# Altium PCB ChipEMG_Ameliore.PcbDoc
Units mil, origin at the board's own origin, x right, y up, seen from the top; angles counter-clockwise.
Board outline 475 x 1625 mil, 6 copper layers (Top Layer, Mid-Layer 1, Mid-Layer 2, VDD, VSS, Bottom Layer); 77 components, 77 nets, 364 pads, 142 vias.
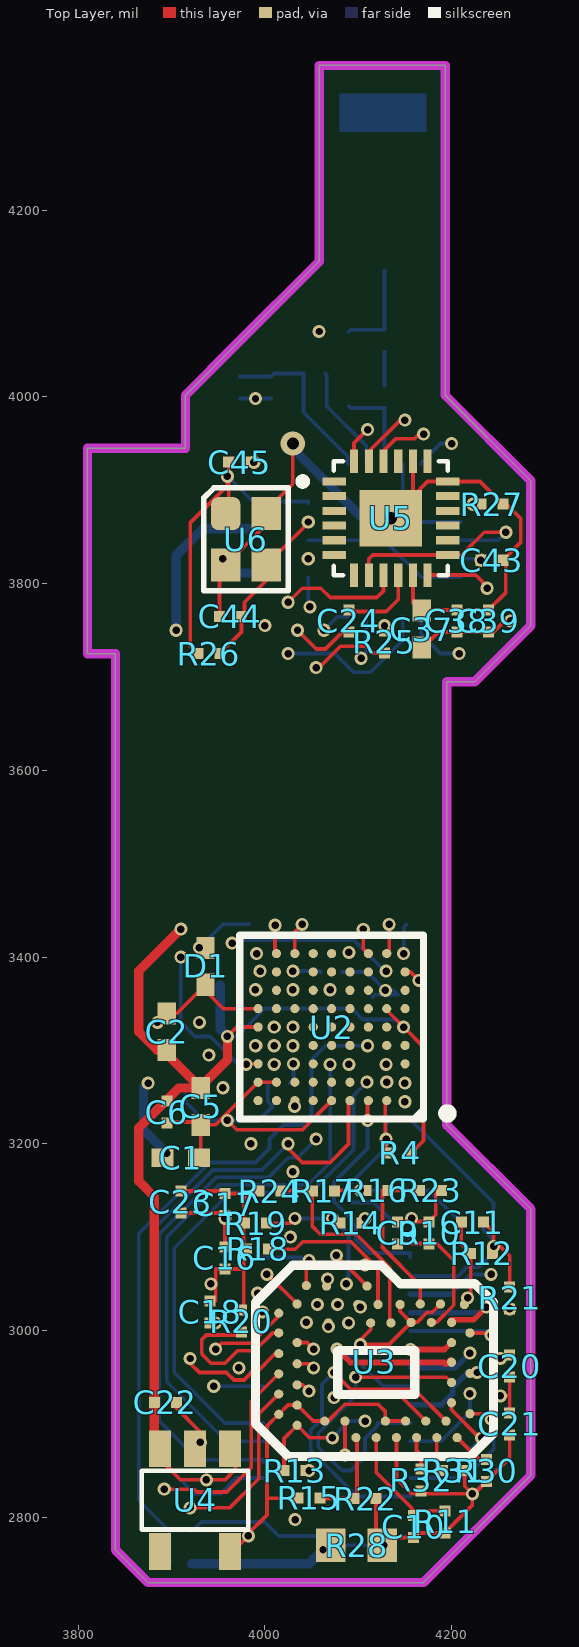
[diagram p0: Top Layer view]
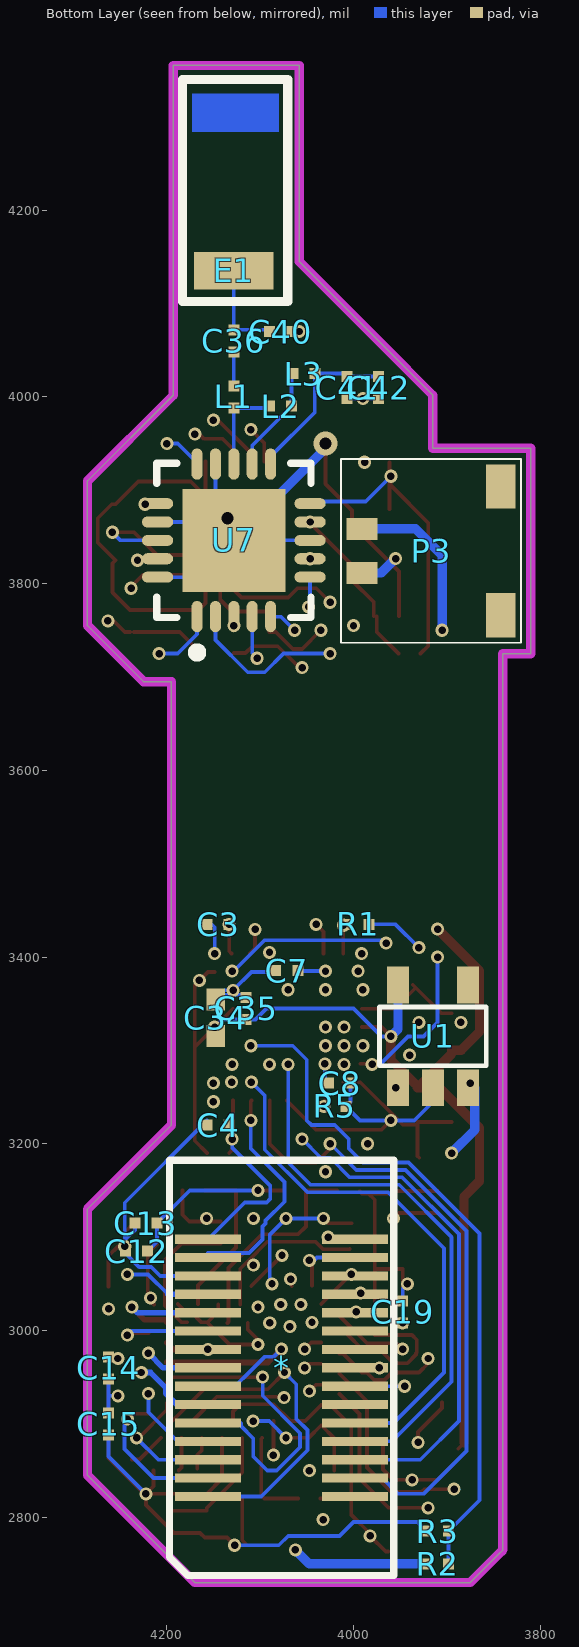
[diagram p1: Bottom Layer view, seen from below]
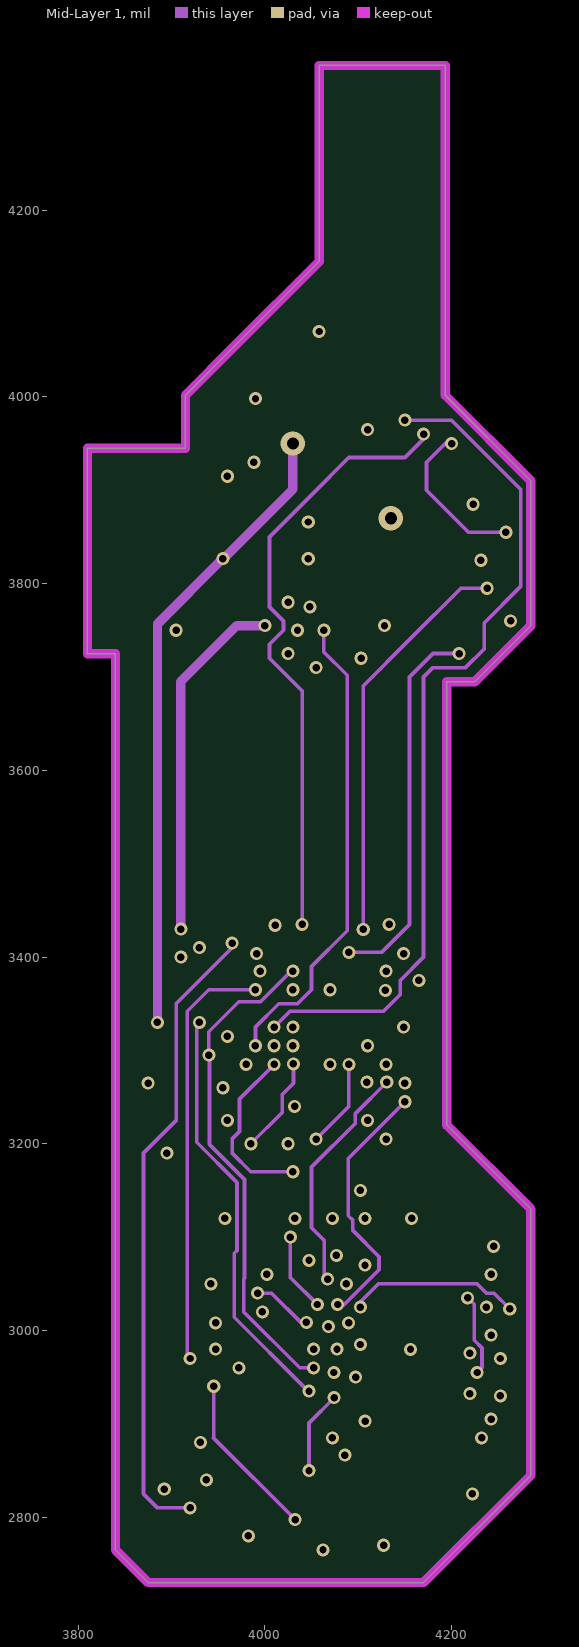
[diagram p2: Mid-Layer 1]
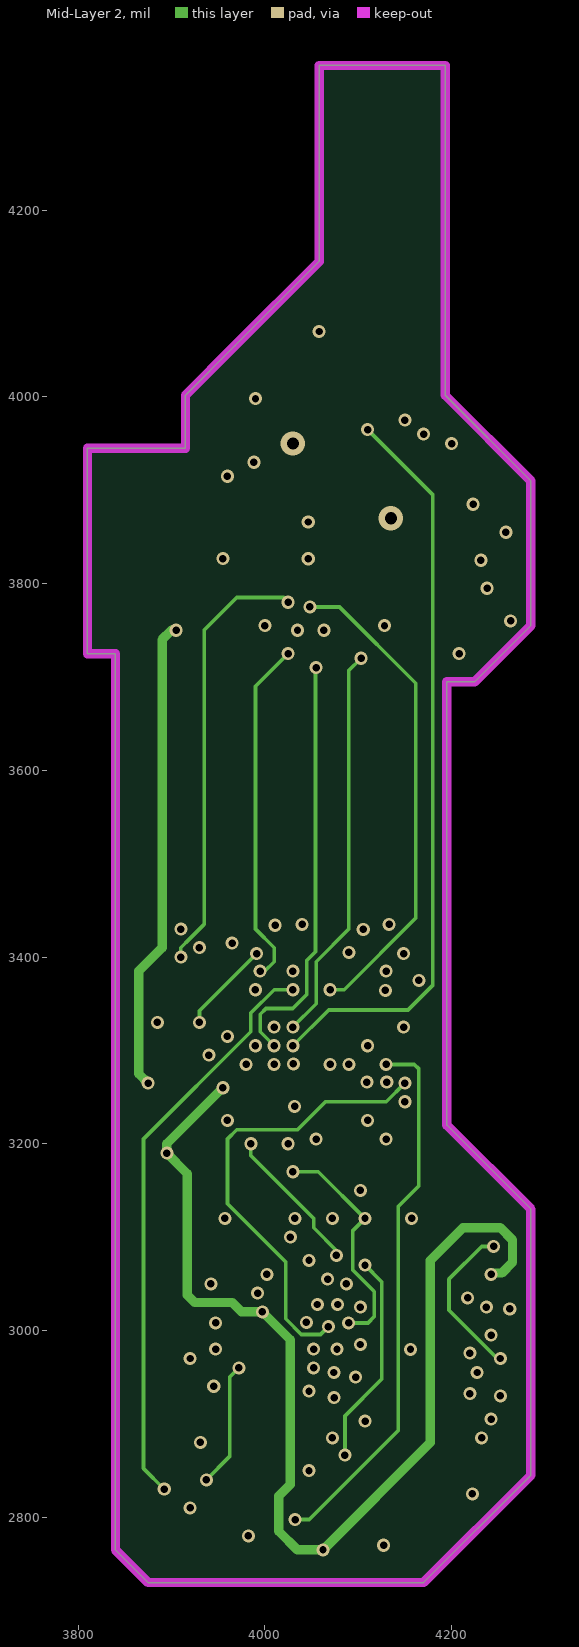
[diagram p3: Mid-Layer 2]
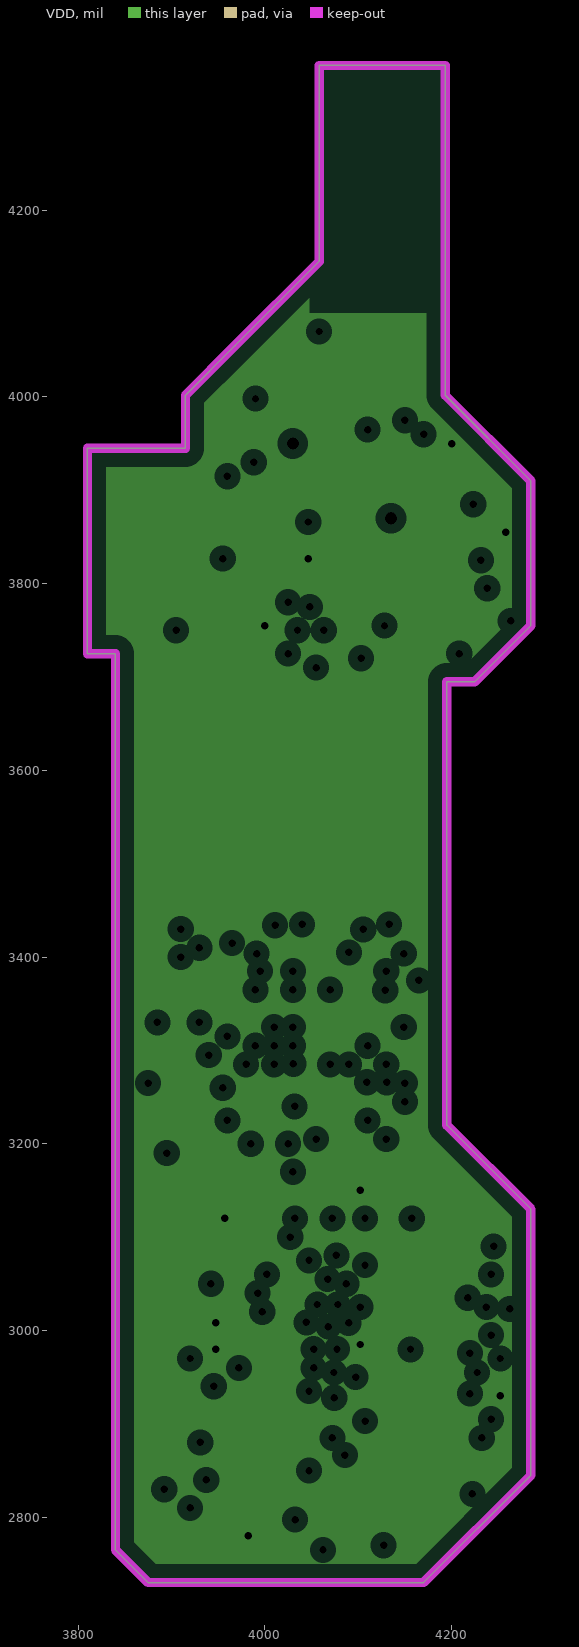
[diagram p4: VDD, clearances drawn from the general rule]
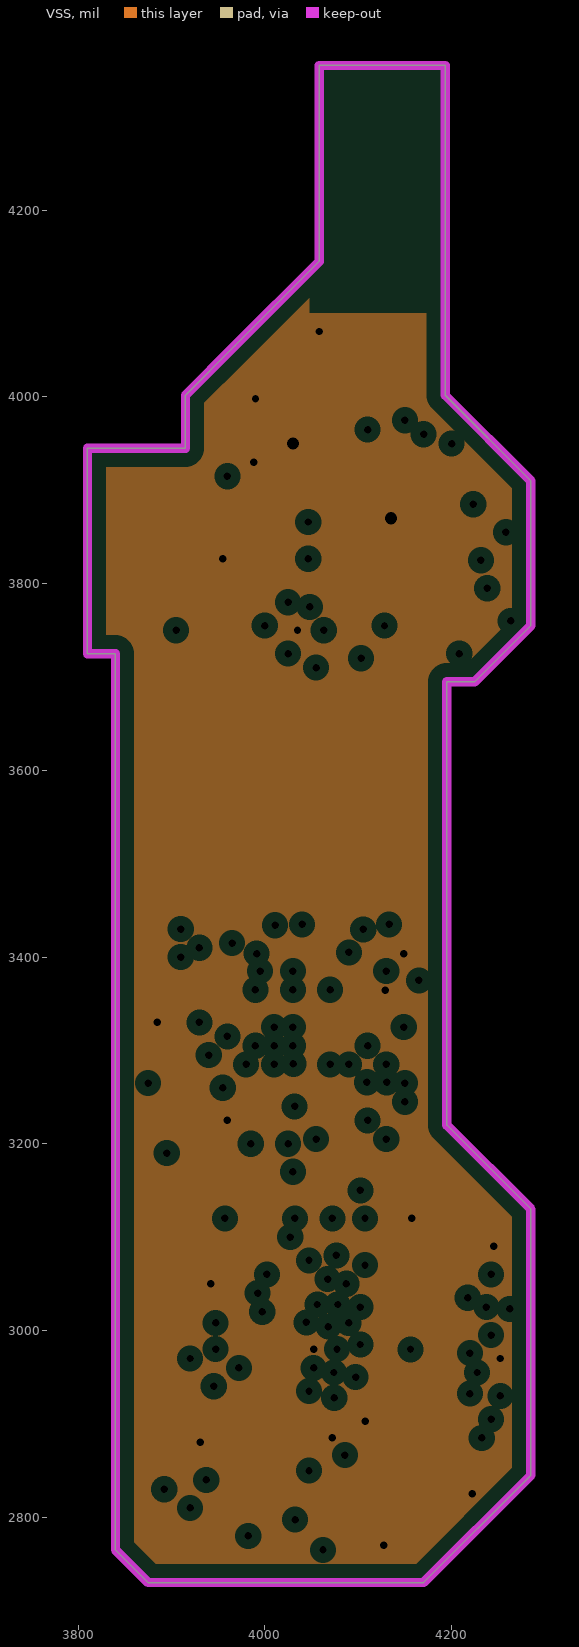
[diagram p5: VSS, clearances drawn from the general rule]
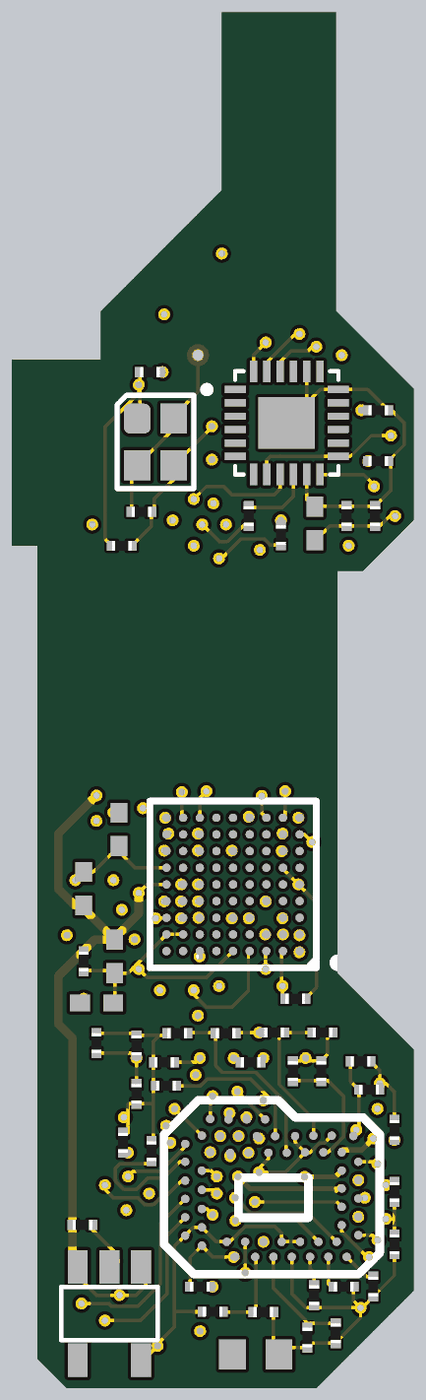
[diagram p6: 3D render of the assembled board from above, using the file's embedded part models]
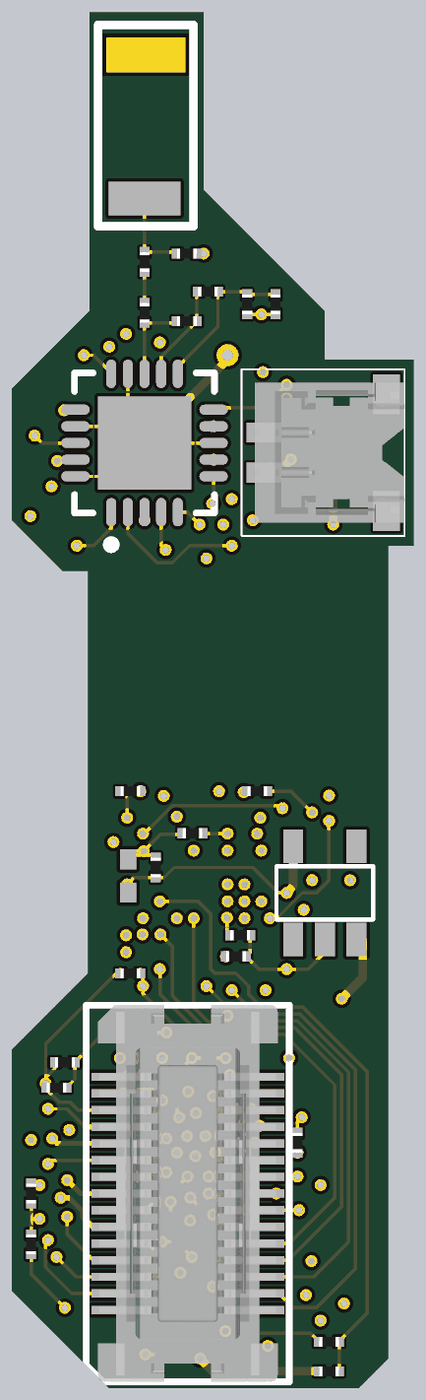
[diagram p7: 3D render of the assembled board from below, using the file's embedded part models]

## Layer stack, top to bottom
Top Solder: solder mask 0.4, Solder Resist, Dk 3.5
Top Layer: signal copper 1.4
Dielectric 1: dielectric 12.6, FR-4, Dk 4.8
Mid-Layer 1: signal copper 1.4
Dielectric3: dielectric 12.6, FR-4, Dk 4.8
Mid-Layer 2: signal copper 1.4
Dielectric4: dielectric 12.6, FR-4, Dk 4.8
VDD: plane copper 1.4, net (Multiple Nets)
Dielectric2: dielectric 12.6, FR-4, Dk 4.8
VSS: plane copper 1.4, net VSSANA
Dielectric5: dielectric 12.6, FR-4, Dk 4.8
Bottom Layer: signal copper 1.4
Bottom Solder: solder mask 0.4, Solder Resist, Dk 3.5

## Board outline
3840,2765 3840,3725 3810,3725 3810,3945 3915,3945 3915,4001.81 3968.19,4055 4058.19,4145 4058.19,4355 4193.19,4355 4193.19,4001.81 4285,3910 4285,3755 4225,3695 4195,3695 4195,3220 4285,3130 4285,2845 4170,2730 3875,2730 3845,2760
board region "Layer Stack Region 1": 4195,3490 4195,3220 4285,3130 4285,2845 4170,2730 3875,2730 3845,2760 3840,2765 3840,3490
board region "Layer Stack Region 1": 3840,3490 3840,3655 4195,3655 4195,3490
board region "Layer Stack Region 1": 3840,3655 3840,3725 3810,3725 3810,3945 3915,3945 3915,4001.81 3968.19,4055 4058.19,4145 4058.19,4355 4193.19,4355 4193.19,4001.81 4285,3910 4285,3755 4225,3695 4195,3695 4195,3655

## Design rules (kind name [scope] priority, off if disabled: settings)
Clearance [All] p1: gap=4
PlaneClearance [All] p1: clearance=10
PlaneConnect [All] p1: planeconnectstyle=Direct reliefexpansion=20 reliefentries=4 reliefconductorwidth=10 reliefairgap=10
PolygonConnect [All] p1: connectstyle=Relief reliefconductorwidth=10 reliefentries=4 polygonreliefangle="90 Angle" airgapwidth=10
RoutingVias [All] p1: holewidth=28 width=50 viastyle="Through Hole" minholewidth=28 minwidth=50 maxholewidth=28 maxwidth=50
SolderMaskExpansion [All] p1: expansion=4
Width [All] p1: maxlimit=10 minlimit=4 preferedwidth=4
28 further rules are at their usual default settings.

## Classes and differential pairs
component class PMU: C1 C2 C22 C23 P3 R28 U1 U4
component class NRF24L01P: C36 C37 C38 C39 C40 C41 C42 C43 C44 C45 E1 L1 L2 L3 R25 R26 R27 U6 U7
component class NewChip: * C7 C8 C9 C10 C11 C12 C13 C14 C15 C16 C17 C18 C19 C20 C21 C34 C35 R10 R11 R12 R13 R14 R15 R16 R17 R18 R19 R20 R21 R22 R23 R24 R30 R31 R32 U3
component class MCU: C3 C4 C5 C6 D1 R1 R2 R3 R4 R5 U2
component class ICM-20948: C24 U5

## Components (designator, comment, footprint, x,y, rotation, side; value= is the part's Value field where it differs from the comment)
* "Molex 529910308" "Molex 0529910308" 4077,2960 r90 bottom
C1 "" 0402 3910,3185 r180 top
C2 "" 0402 3895,3320 r270 top
C3 "" 0201_Custom 4145,3435 r180 bottom
C4 "" 0201_Custom 4145,3220 r0 bottom
C5 "" 0402 3931.51,3240 r90 top
C6 "" 0201_Custom 3895,3233.97 r90 top
C7 "" 0201_Custom 4071.52,3385.44 r0 bottom
C8 "" 0201_Custom 4015,3265 r180 bottom
C9 "" 0201_Custom 4142.31,3104.56 r90 top
C10 "" 0201_Custom 4159.37,2790 r270 top
C11 "" 0201_Custom 4222.31,3116.14 r0 top
C12 "" 0201_Custom 4232.31,3085 r0 bottom
C13 "" 0201_Custom 4222.31,3115 r0 bottom
C14 "" 0201_Custom 4262.31,2960 r90 bottom
C15 "" 0201_Custom 4262.31,2900 r270 bottom
C16 "" 0201_Custom 3957.31,3077.75 r270 top
C17 "" 0201_Custom 3957.31,3135 r90 top
C18 "" 0201_Custom 3941.37,3020 r90 top
C19 "" 0201_Custom 3947.31,3020 r90 bottom
C20 "" 0201_Custom 4262.31,2961.81 r90 top
C21 "" 0201_Custom 4262.31,2900 r270 top
C22 "" 0201_Custom 3893.5,2923 r0 top
C23 "" 0201_Custom 3910,3137.63 r90 top
C24 "" 0201_Custom 4090,3760 r270 top
C34 "" 0402 4147.57,3335 r270 bottom
C35 "" 0201_Custom 4115,3345 r270 bottom
C36 "" 0201_Custom 4128.19,4060 r270 bottom
C37 "" 0402 4168.19,3751.33 r270 top
C38 "" 0201_Custom 4205.76,3760 r270 top
C39 "" 0201_Custom 4239.39,3760 r270 top
C40 "" 0201_Custom 4078.19,4070 r180 bottom
C41 "" 0201_Custom 4006.82,4010 r90 bottom
C42 "" 0201_Custom 3973.19,4010 r90 bottom
C43 "" 0201_Custom 4243.19,3825 r180 top
C44 "" 0201_Custom 3963.19,3765 r0 top
C45 "" 0201_Custom 3973.19,3930 r180 top
D1 "" 0402 3936.51,3390 r270 top
E1 "" ANT-2.45-CHP-B 4128.19,4135 r90 bottom
L1 "" 0201_Custom 4128.19,4000 r90 bottom
L2 "" 0201_Custom 4078.19,3990 r0 bottom
L3 "" 0201_Custom 4053.19,4025 r180 bottom
P3 "WM4459CT-ND" WM4459CT-ND_Footprint 3915,3835 r90 bottom
R1 "" 0201_Custom 3995,3435 r0 bottom
R2 "" 0201_Custom 3910,2750 r180 bottom
R3 "" 0201_Custom 3910,2785 r0 bottom
R4 "" 0201_Custom 4145,3190 r180 top
R5 "" 0201_Custom 4020,3240 r180 bottom
R10 "" 0201_Custom 4175.94,3104.56 r90 top
R11 "" 0201_Custom 4193.01,2795 r270 top
R12 "" 0201_Custom 4232.31,3082.5 r0 top
R13 "" 0201_Custom 4032.31,2850 r180 top
R14 "" 0201_Custom 4092.31,3115 r180 top
R15 "" 0201_Custom 4047.31,2820.44 r0 top
R16 "" 0201_Custom 4120,3150 r0 top
R17 "" 0201_Custom 4062.75,3149.26 r180 top
R18 "" 0201_Custom 3992.31,3087.5 r180 top
R19 "" 0201_Custom 3990.05,3115 r180 top
R20 "" 0201_Custom 3975,3010 r90 top
R21 "" 0201_Custom 4262.31,3035 r90 top
R22 "" 0201_Custom 4107.31,2820 r0 top
R23 "" 0201_Custom 4177.26,3150 r0 top
R24 "" 0201_Custom 4005.5,3149.26 r180 top
R25 "" 0201_Custom 4128.19,3737.55 r270 top
R26 "" 0201_Custom 3940,3725 r0 top
R27 "" 0201_Custom 4243.19,3885 r180 top
R28 "" 1608[0603] 4098.34,2770 r180 top
R30 "" 0201_Custom 4237.31,2850 r270 top
R31 "" 0201_Custom 4202.31,2850 r0 top
R32 "" 0201_Custom 4167.31,2840 r270 top
U1 "TLV70019DDCT" SOT23-5Metric 3915,3315 r180 bottom
U2 "MSP430F5328IZQE" TI-ZQE80 4071.52,3325 r180 top
U3 "CustomSoC" CustomSoC 4117.31,2955 r0 top locked
U4 "LP3990" SOT23-5Metric 3925.32,2818.3 r180 top
U5 "ICM-20948" ICM-20948 4135,3870 r0 top
U6 "16MHz XTAL" 8Y-16.000MAAV-T 3958.19,3875 r270 top
U7 "" QFN50P400X400-20W5M 4128.19,3846.29 r90 bottom

## Footprints (in the part's own frame and the unit in brackets; to place one, negate y for a bottom-side part, rotate by r counter-clockwise, add the part's x,y. Pads: shape width x height; smd on the part's side, far side on the other; paste and mask are expansions set on the pad)
8Y-16.000MAAV-T [mm] "SMD Crystal"
  rrect50% 0.9x0.8 smd: 1(0,0)
  rect 0.9x0.8 smd: 2(1.4,0) 3(1.4,1.1) 4(0,1.1)
  silkscreen extent -0.7,-0.6 2.1,1.7
0201_Custom [mm]
  rect 0.3x0.3 smd paste+0 mask+0.075: 1(-0.3,0) 2(0.3,0)
  body extent -0.3,-0.15 0.3,0.15, height 0.3
0402 [mm] "Chip Capacitor, Body 1.0x0.5mm, IPC High Density"
  rect 0.6x0.5 smd: 1(-0.5,0) 2(0.5,0)
  body extent -0.55,-0.3 0.55,0.3, height 1.3
1608[0603] [mm] "Chip Capacitor, Body 1.6x0.8mm, IPC High Density"
  rect 0.8x0.9 smd: 1(-0.7,0) 2(0.7,0)
  body extent -0.87,-0.48 0.87,0.48, height 1.3
ANT-2.45-CHP-B [mil] "2.4 GHz Chip Anetnna"
  rect 40x85 smd: 1(0,0)
  Top Layer region: 148.92,45 190,45 190,-48.3 148.92,-48.3
  silkscreen extent -33,-58 205,55
CustomSoC [mm]
  round 0.25 smd: 10(-1.35,-1.322) 11(-0.8,-1.322) 12(-1.1,-1.772) 13(-0.5,-1.772) 14(-0.25,-1.322) 15(0.05,-1.772) 16(0.3,-1.322) 17(0.6,-1.772) 18(0.85,-1.322) 19(1.15,-1.772) 20(1.4,-1.322) 21(1.7,-1.772) 22(2.25,-1.772) 27(1.95,-1.322) 28(2.6,-1.122) 29(2.1,-0.822) 30(2.6,-0.572) 31(2.1,-0.272) 32(2.6,-0.022) 33(2.1,0.278) 34(2.6,0.528) 35(2.1,0.814) 36(2.6,1.078) 37(2.1,1.364) 43(2.45,1.85) 44(1.55,1.364) 45(1.8,1.864) 46(1,1.364) 47(1.25,1.864) 48(0.45,1.35) 49(0.7,1.85) 50(-0.1,1.35) 51(0.1,1.85) 54(-0.2,2.35) 55(-0.45,1.85) 56(-0.75,2.35) 57(-0.7,1.35) 58(-1,1.85) 59(-1.3,2.35) 60(-1.25,1.35) 61(-1.55,1.85) 62(-1.85,2.364) 63(-1.85,1.364) 64(-2.1,1.864) 65(-2.6,1.614) 66(-2.1,0.814) 69(-2.6,1.078) 70(-2.1,0.238) 71(-2.6,0.514) 72(-2.6,-0.036) 73(-2.1,-0.336) 74(-2.6,-0.586) 75(-2.1,-0.886) 76(-2.6,-1.136) 77(-2.1,-1.436)
  silkscreen extent -1,-0.6 1.1,0.6, body extent -0.96,-0.49 1.07,0.53, height 0.55
ICM-20948 [mm]
  rect 0.64x0.22 smd: 1(-1.545,1) 2(-1.545,0.6) 3(-1.545,0.2) 4(-1.545,-0.2) 5(-1.545,-0.6) 6(-1.545,-1) 13(1.545,-1) 14(1.545,-0.6) 15(1.545,-0.2) 16(1.545,0.2) 17(1.545,0.6) 18(1.545,1)
  rect 0.22x0.64 smd: 7(-1,-1.545) 8(-0.6,-1.545) 9(-0.2,-1.545) 10(0.2,-1.545) 11(0.6,-1.545) 12(1,-1.545) 19(1,1.545) 20(0.6,1.545) 21(0.2,1.545) 22(-0.2,1.545) 23(-0.6,1.545) 24(-1,1.545)
  rect 1.7x1.54 smd: 25(0,0)
  silkscreen extent -1.55,-1.55 1.55,1.55
"Molex 0529910308" [mm]
  rect 0.25x1.8 smd: 1(-3.5,2) 2(-3.5,-2) 3(-3,2) 4(-3,-2) 5(-2.5,2) 6(-2.5,-2) 7(-2,2) 8(-2,-2) 9(-1.5,2) 10(-1.5,-2) 11(-1,2) 12(-1,-2) 13(-0.5,2) 14(-0.5,-2) 15(0,2) 16(0,-2) 17(0.5,2) 18(0.5,-2) 19(1,2) 20(1,-2) 21(1.5,2) 22(1.5,-2) 23(2,2) 24(2,-2) 25(2.5,2) 26(2.5,-2) 27(3,2) 28(3,-2) 29(3.5,2) 30(3.5,-2)
  silkscreen extent -5.65,-3.05 5.65,3.05, body extent -5.65,-2.7 5.65,2.7, height 2.33
QFN50P400X400-20W5M [mm] "QFN, 20-Leads, Body 4x4mm, Pitch 0.5mm, IPC Low Density"
  oval 0.85x0.3 smd: 1(-2.075,1) 2(-2.075,0.5) 3(-2.075,0) 4(-2.075,-0.5) 5(-2.075,-1) 11(2.075,-1) 12(2.075,-0.5) 13(2.075,0) 14(2.075,0.5) 15(2.075,1)
  oval 0.3x0.85 smd: 6(-1,-2.075) 7(-0.5,-2.075) 8(0,-2.075) 9(0.5,-2.075) 10(1,-2.075) 16(1,2.075) 17(0.5,2.075) 18(0,2.075) 19(-0.5,2.075) 20(-1,2.075)
  rect 2.8x2.8 smd: 21(0,0)
  silkscreen extent -3.17,-2.1 2.1,2.1, body extent -2.07,-2.07 2.07,2.07, height 0.8
SOT23-5Metric [mm] "Ti SOT23-5 Package DBV"
  rect 0.6x1 smd: 1(-0.95,-1.4) 2(0,-1.4) 3(0.95,-1.4) 4(0.95,1.4) 5(-0.95,1.4)
  silkscreen extent -1.45,-0.8 1.45,0.8
TI-ZQE80 [mm] "BGA, 80-Balls, Body 5x5mm, Pitch 0.5mm"
  round 0.25 smd: A1(-2,2) A2(-1.5,2) A3(-1,2) A4(-0.5,2) A5(0,2) A6(0.5,2) A7(1,2) A8(1.5,2) A9(2,2) B1(-2,1.5) B2(-1.5,1.5) B3(-1,1.5) B4(-0.5,1.5) B5(0,1.5) B6(0.5,1.5) B7(1,1.5) B8(1.5,1.5) B9(2,1.5) C1(-2,1) C2(-1.5,1) C4(-0.5,1) C5(0,1) C6(0.5,1) C7(1,1) C8(1.5,1) C9(2,1) D1(-2,0.5) D2(-1.5,0.5) D3(-1,0.5) D4(-0.5,0.5) D5(0,0.5) D6(0.5,0.5) D7(1,0.5) D8(1.5,0.5) D9(2,0.5) E1(-2,0) E2(-1.5,0) E3(-1,0) E4(-0.5,0) E5(0,0) E6(0.5,0) E7(1,0) E8(1.5,0) E9(2,0) F1(-2,-0.5) F2(-1.5,-0.5) F3(-1,-0.5) F4(-0.5,-0.5) F5(0,-0.5) F6(0.5,-0.5) F7(1,-0.5) F8(1.5,-0.5) F9(2,-0.5) G1(-2,-1) G2(-1.5,-1) G3(-1,-1) G4(-0.5,-1) G5(0,-1) G6(0.5,-1) G7(1,-1) G8(1.5,-1) G9(2,-1) H1(-2,-1.5) H2(-1.5,-1.5) H3(-1,-1.5) H4(-0.5,-1.5) H5(0,-1.5) H6(0.5,-1.5) H7(1,-1.5) H8(1.5,-1.5) H9(2,-1.5) J1(-2,-2) J2(-1.5,-2) J3(-1,-2) J4(-0.5,-2) J5(0,-2) J6(0.5,-2) J7(1,-2) J8(1.5,-2) J9(2,-2)
  silkscreen extent -3.28,-2.5 2.5,2.5, body extent -2.5,-2.5 2.5,2.5, height 1
WM4459CT-ND_Footprint [mm]
  rect 0.6x0.85 smd mask+0.08: 1(-0.6,1.925) 2(0.6,1.925)
  rect 1.2x0.8 smd mask+0.08: ""(-1.75,-1.85) ""(1.75,-1.85)
  silkscreen extent -2.5,-2.4 2.5,2.5, body extent -2.1,-2.4 2.1,2.13, height 1.4

## Part data
C1 C2 C3 C4 C5 C6 C7 C8 C9 C10 C11 C12 C13 C14 C15 C16 C17 C18 C19 C20 C21 C22 C23 C24 C34 C35 C36 C37 C38 C39 C40 C41 C42 C43 C44 C45: library part "Cap Semi", "Capacitor (Semiconductor SIM Model)"
D1: library part LED3, "Typical BLUE SiC LED"
E1: library part Antenna, "Generic Antenna"
L1 L2 L3: library part Inductor, "Inductor"
P3: "1.20MM WTB RECEPT CONNECTOR"
R1 R2 R3 R4 R5 R10 R11 R12 R13 R14 R15 R16 R17 R18 R19 R20 R21 R22 R23 R24 R25 R26 R27 R28 R30 R31 R32: library part "Res Semi", "Semiconductor Resistor"
U1: library part LP3990, "150mA Linear Voltage Regulator for Digital Applications"
U2: "25 MHz Mixed Signal Microcontroller with 128 KB Flash, 10240 B SRAM and 48 GPIOs, -40 to 85 degC, 80-pin BGA (ZQE), Green (RoHS & no Sb/Br)"
U4: "150mA Linear Voltage Regulator for Digital Applications"
U5: "9 Axis=3 Axis Gyro+3 Axis Accel+Compass. Pin For Pin With m"
U6: library part 8Y-16.000MAAV-T, "SMD 16 MHz XTAL"
U7: library part nRF24L01p, "nRF24L01+"

## Via types
v1: diameter 14, hole 8, Top Layer to Bottom Layer, 140 vias
v2: diameter 26, hole 13, Top Layer to Bottom Layer, 1 vias
v3: diameter 25.98, hole 12.99, Top Layer to Bottom Layer, tented top, 1 vias

## Nets (pads, with @x,y where several pads share a name; then routed paths per layer and width w, separated by ;. In a path a pad name is that pad's centre, name@x,y a point inside that pad or via, vN(x,y) a via of type N, cw(c..) or ccw(c..) an arc to the next point about the centre after c; other vN are vias at no path point)
0.4REF: R15.2 R22.1 U3.13 | length 103.5
  Top Layer w4: R15.2@4059.12,2820 R22.1 4098.81,2823.31 4098.81,2884.04 U3.13
0.6REF: R16.2 R23.1 U3.47 | length 172.1
  Top Layer w4: R23.1@4159.56,3150 4125.93,3150 4125.93,3088.83 4166.52,3048.24 U3.47
0.8REF: R17.2 R24.1 U3.48 | length 232.9
  Top Layer w4: R24.1@4017.31,3150 4050.94,3150 4050.94,3111.37 4059.31,3103 4097.94,3103 4133.95,3066.99 4133.95,3009.23 U3.48
+1.2V: C12.1 C13.1 C14.1 C15.1 C16.1 C17.1 C18.1 C19.1 C20.1 C21.1 C23.1 R15.1 R16.1 R17.1 U3.10 U3.16 U3.18 U3.45 U3.46 U3.49 U3.50 U3.65 U3.75 U3.76 U4.5 | length 994.2
  Top Layer w4: C23.1 3951.49,3125.82 v1(3957.31,3120) C16.1 ; v1(3947.31,2980) 3953.59,2986.28 3985.7,2986.28 4014.94,3015.53 U3.65 ; U4.5 3965.49,2763.18 v1(3982.31,2780) ; v1@3981.07,2781.24 4002.31,2802.48 4002.31,2820 ; 4025.5,2820 R15.1@4035.5,2820 ; R15.1 4002.75,2820.44 4002.31,2820 ; R17.1@4074.56,3150 v1(4102.31,3150) R16.1 ; U3.50 4113.37,3001.06 4097.31,2985 v1(4102.31,2985) 4132.98,2985 U3.46 ; U3.49 4144.87,3020.51 U3.46 ; U3.18 U3.16 4129.12,2913.19 4121.31,2921 4085.69,2921 4067.64,2902.95 U3.10 4051.8,2902.95 U3.75 4024.79,2920.11 U3.76 4002.31,2897.63 4002.31,2820 ; U3.45 4179.41,3019.62 4173.81,3019.62 4162.89,3008.7 U3.46 ; v1(4252.31,2930) 4262.31,2930 ; C21.1 4262.31,2930 ; C20.1 4262.31,2930
  Bottom Layer w4: v1(4102.31,3150) 4175.5,3150 C13.1 4210.5,3095 C12.1 ; v1(4252.31,2930) 4262.31,2930 ; C15.1 4262.31,2930 ; C14.1 4262.31,2930
  other v1: 3947.31,3008.19
+1.9V: *.16 C2.2 C5.2 C6.2 C22.1 C34.2 C35.2 C37.2 C38.2 C39.2 R4.1 U1.5 U2.E1 U2.E9 U2.F2 U2.H1 U4.1 U4.3 U5.8 U5.13 U7.7 U7.15 U7.18 | length 2480.4
  Top Layer w4: U4.3@3881.69,2879.66 U4.3 ; U4.3@3893.5,2856.5 3910,2840 v1(3937.31,2840) 3957.31,2840 3968.3,2850.99 3968.3,2880.12 U4.1@3972.31,2884.12 ; C2.2@3895,3296.19 C2.2 ; C5.2 3935,3259.69 C5.2@3935,3265 ; v1(3960,3315) 3970,3325 U2.E9@3991.26,3325 ; v1(4000,3755) v1@4000,3755.81 ; U5.8 4111.38,3826.38 4115.63,3830.63 U5.13 4210.63,3830.63 4235,3855 v1(4258.19,3855) ; U2.F2@4129.06,3344.68 v1(4148.74,3325) 4170,3303.74 ; U2.H1@4148.74,3384.06 U2.H1 4155.94,3384.06 v1(4165,3375) 4170,3370 4170,3303.74 ; R4.1 4170,3203.19 4170,3303.74 ; C37.2@4168.19,3730.31 4186.06,3748.19 C38.2 C39.2@4235,3748.19 ; C39.2 4245,3748.19 4256.81,3760 v1(4263.19,3760)
  Top Layer w10: U4.3@3881.69,2879.66 C22.1 3881.69,3143.31 3865,3160 3865,3216.81 3907.87,3259.69 C5.2 C2.2@3895,3296.19 ; C2.2 3884.69,3300.31 3865,3320 3865,3385 v1(3910,3430) ; C5.2@3935,3265 3960,3290 v1(3960,3315)
  Mid-Layer 1 w4: v1(4200,3950) 4193.19,3950 4173.19,3930 4173.19,3900 4218.19,3855 v1(4258.19,3855)
  Mid-Layer 1 w10: v1(3910,3430) 3910,3695 3970,3755 v1(4000,3755)
  Mid-Layer 2 w4: v1(3937.31,2840) 3962.31,2865 3962.31,2950 v1(3972.31,2960)
  Bottom Layer w4: v1(3960,3315) 3970,3315 4000,3345 4093.19,3345 4105,3333.19 4140.55,3333.19 v1(4148.74,3325) ; U7.15 4167.56,3929.37 4188.19,3950 v1(4200,3950) ; U7.18 4249.48,3846.29 v1(4258.19,3855)
  Bottom Layer w10: U1.5 3952.4,3322.6 v1(3960,3315)
  other v1: 4046.5,3826.6
ANALOGBIAS: R18.1 U3.11 U3.51 | length 442
  Top Layer w4: R18.1 4004.12,3087 4032.69,3087 4040.69,3095 4092.31,3095 4112.31,3075 ; v1(4085.81,2866.5) U3.11 ; v1(4107.31,3070) 4112.31,3075 ; U3.51 4121.24,3066.06 4112.31,3075
  Mid-Layer 2 w4: v1(4085.81,2866.5) 4085.81,2908.5 4125.31,2948 4125.31,3052 v1(4107.31,3070)
CLK: C8.1 U2.C7 U3.54 | length 330.8
  Top Layer w4: v1(4076.6,3080.35) U3.54
  Mid-Layer 1 w4: v1(3985,3200) 4018.81,3233.81 4018.81,3253 4030.63,3264.82 v1(4030.63,3285.63)
  Mid-Layer 2 w4: v1(3985,3200) 3985,3187.31 4052.31,3120 4052.31,3110 4076.6,3085.71 v1(4076.6,3080.35)
  Bottom Layer w4: C8.1 4030.63,3268.82 v1(4030.63,3285.63)
DACM+: C9.1 R10.1 U3.44 | length 147
  Top Layer w4: C9.1@4142.31,3093.19 4184.12,3093.19 4202.31,3075 4202.31,3027.07 4183.93,3008.7 U3.44
DACM-: C10.1 R11.1 U3.15 | length 129.2
  Top Layer w4: U3.15 4119.28,2848.03 4157.31,2810 4157.31,2806.81 R11.1@4192.31,2806.81
DIGMISO: U2.G7 U3.72 | length 845.1
  Top Layer w4: v1(3892.31,2830) 3924.31,2830 3927.31,2827 3959.31,2827 3985.54,2853.23 3985.54,2924.17 U3.72
  Mid-Layer 2 w4: v1(3892.31,2830) 3870,2852.31 3870,3205 3985,3320 3985,3340 4010,3365 v1(4030,3365)
  Bottom Layer w4: v1@3887.31,2830 v1(3892.31,2830)
DIGMOSI: U2.G9 U3.71 | length 575.3
  Top Layer w4: v1(3920,2970) 3920,2965 3930,2955 3959.31,2955 3959.31,2954.62 3966.92,2947 3977.69,2947 3985.31,2954.62 3985.31,2955 3990.99,2955 4011.23,2975.23 U3.71
  Mid-Layer 1 w4: v1(3920,2970) 3917,2973 3917,3342 3940,3365 v1(3990,3365)
DIGRST: U2.H2 U3.74 | length 1051.5
  Top Layer w4: v1(3920,2810) 3962.31,2810 3993.54,2841.23 3993.54,2910.52 U3.74
  Mid-Layer 1 w4: v1(3920,2810) 3885,2810 3870,2825 3870,3190 3905,3225 3905,3350 3965,3410 v1(3965,3415)
  Bottom Layer w4: v1(3965,3415) 3968,3418 4095.38,3418 4128.38,3385 v1(4130,3385)
DIGSCLK: C7.1 U2.H7 U3.70 | length 584.8
  Top Layer w4: U3.70 4051.67,2964.37 4052.31,2963.73 v1(4052.31,2960)
  Mid-Layer 1 w4: v1(4030,3385) 4028.38,3385 3995.38,3352 3972,3352 3940,3320 v1(3940,3295) 3940.66,3294.34 3940.66,3199.34 3978.31,3161.69 3978.31,3056 3977.31,3055 3977.31,3020 4037.31,2960 v1(4052.31,2960)
  Bottom Layer w4: v1(4030,3385) 4058.76,3385 C7.1@4059.7,3384.06
DIGSS: U2.J9 U3.73 | length 560.7
  Top Layer w4: U3.73 4040.54,2941.77 v1(4047.31,2935)
  Mid-Layer 1 w4: v1@3930,3335 v1(3930,3330) 3927,3327 3927,3201.69 3970.31,3158.38 3970.31,3085.69 3967.31,3082.69 3967.31,3014.19 4041.5,2940
  Mid-Layer 2 w4: v1(3930,3330) 3930,3342.48 v1(3991.26,3403.74)
LED1: *.26 U3.64 | length 45.4
  Top Layer w4: v1(4002.31,3060) 4003.01,3060 U3.64
LED2: *.24 U3.63 | length 65.1
  Mid-Layer 1 w4: v1(3992.31,3040) 4007.31,3040 4038.61,3008.7 v1(4044.47,3008.7)
LED3: *.28 U3.62 | length 85.2
  Top Layer w4: U3.62 4044.47,3072.17 v1(4047.31,3075)
  Bottom Layer w4: *.28@3998.57,3078.11 4039.2,3078.11 4047.31,3070 v1(4047.31,3075)
LED4: *.30 U3.61 | length 84.2
  Mid-Layer 1 w4: v1(4027.31,3100) 4027.31,3056.81 v1(4056.28,3027.83)
LEDBIASRES: R20.1 U3.69 | length 166.4
  Top Layer w4: R20.1@3977.31,2998.19 3977.31,2995.19 3937.5,2995.19 3932.31,2990 3932.31,2976.08 3933,2975.38 3933,2974.31 3942.31,2965 3957.31,2965 3970.59,2978.28 3989.01,2978.28 4008.17,2997.44 U3.69 U3.69@4014.19,2998.19
LEDBITSEQ: U2.A1 U3.58 | length 278.6
  Mid-Layer 1 w4: v1(4077.94,3027.83) 4085.14,3027.83 4122.31,3065 4122.31,3079 4094.31,3107 4094.31,3118 4089.31,3123 4089.31,3184.31 v1(4150,3245)
LEDCLK: U2.B1 U3.60 | length 493.4
  Top Layer w4: v1(4068.09,3004.21) U3.60
  Mid-Layer 2 w4: v1(4068.09,3004.21) 4059.58,2995.7 4039.09,2995.7 4022.31,3012.48 4022.31,3073.38 3960,3135.69 3960,3205 3970,3215 4035,3215 4065,3245 4130,3245 v1(4150,3265)
LEDON: U2.B2 U3.59 | length 259.5
  Top Layer w4: U3.59 4066.13,3053.82 v1(4067.31,3055)
  Mid-Layer 1 w4: v1(4067.31,3055) 4063.6,3058.71 4063.6,3096.4 4050,3110 4050,3175 4097,3222 4097,3232.37 v1(4130.57,3265.94)
LEDPWM: R14.1 U2.C8 U3.57 | length 435.2
  Mid-Layer 1 w4: v1(4010,3285) 3973,3248 3973,3213 3965,3205 3965,3190 3985,3170 v1(4030,3170)
  Mid-Layer 2 w4: v1(4030,3170) 4057.31,3170 v1(4107.31,3120) 4094.31,3107 4094.31,3064.62 4117.31,3041.62 4117.31,3015 4110.46,3008.15 v1(4089.75,3008.15)
LEDVRES: R21.1 U3.55 | length 184.7
  Mid-Layer 1 w4: v1(4102.31,3025) 4102.31,3030.55 4121.76,3050 4227.31,3050 4237.31,3040 4245.5,3040 v1(4262.31,3023.19)
LEDVRESSET: R14.2 R19.1 U3.56 | length 150.6
  Top Layer w4: R19.1 4027.31,3115 v1(4032.31,3120)
  Bottom Layer w4: v1(4032.31,3120) v1(4072.31,3120) 4089.6,3102.71 4089.6,3052.29 v1(4087.31,3050)
Net*_14: *.14 U2.C2 | length 818.9
  Mid-Layer 1 w4: v1(3945.32,2940.32) 3945.32,2885.32 3945,2885 v1(4032.5,2797.5)
  Mid-Layer 2 w4: v1@4030,2795 v1(4032.5,2797.5) 4047.5,2797.5 4143.05,2893.05 4143.05,3133.05 4165,3155 4165,3280 4160,3285 v1(4130,3285)
  Bottom Layer w4: v1(3945.32,2940.32) *.14
NetC3_2: C3.2 U2.J2 | length 39.2
  Top Layer w4: U2.J2 4133.14,3406.31 v1(4133.14,3435)
  Bottom Layer w4: C3.2@4128.19,3435 4130.57,3437.38 4132.95,3435 v1(4133.14,3435)
NetC24_1: C24.1 U5.10 | length 84.5
  Top Layer w4: C24.1@4090,3770 4130,3770 4142.87,3782.87 U5.10
NetC36_1: C36.1 C40.1 E1.1 | length 102.1
  Bottom Layer w4: C40.1 4091.81,4071.81 C36.1 E1.1
NetC36_2: C36.2 L1.2 | length 36.4
  Bottom Layer w4: L1.2 C36.2
NetC41_2: C41.2 C42.2 L3.2 U7.11 | length 186.2
  Bottom Layer w4: C42.2 C41.2 4010.01,4025 L3.2 4041.38,3983.62 4088.82,3936.18 U7.11
NetC43_2: C43.2 U7.19 | length 22.2
  Bottom Layer w4: U7.19 4229.77,3826.6 v1(4231.38,3825)
NetC44_2: C44.2 R26.2 U6.3 U7.9 | length 178.9
  Top Layer w4: R26.2 3975,3748.19 C44.2 ; C44.2@3978.19,3765 3978.19,3780 4001.5,3803.31 U6.3 4046.5,3864.88 v1(4046.5,3865.97)
NetC45_2: C45.2 R26.1 U6.1 U7.10 | length 360
  Top Layer w4: R26.1 3920,3733.19 3920,3865 3960,3905 v1(3960,3915) ; U6.1@3961.38,3880 C45.2
  Bottom Layer w4: v1(3960,3915) 3987,3888 4046.5,3888 U7.10
NetD1_1: D1.1 R1.1 | length 63.5
  Bottom Layer w4: v1(3930,3410) 3955,3435 R1.1
NetL1_1: L1.1 L2.2 U7.13 | length 99.1
  Bottom Layer w4: L2.2 4091.81,3988.19 L1.1 U7.13
NetL2_1: L2.1 L3.1 U7.12 | length 115
  Bottom Layer w4: L3.1 4066.38,4023.62 L2.1 4108.5,3947.87 U7.12
NetR1_2: R1.2 U2.J8 | length 31.7
  Top Layer w4: v1@4010,3435 v1(4010.94,3434.06) U2.J8@4010.94,3403.74
NetR2_2: R2.2 R3.1 U2.D3 | length 739.9
  Bottom Layer w4: R2.2 R3.1 3865,2818.19 3865,3103.94 3941.06,3180 3990,3180 4005,3195 4005,3205 4020,3220 4045,3220 4050,3225 4050,3290 4065,3305 v1(4110,3305)
NetR5_1: R5.1 U2.A7 | length 6.7
  Top Layer w4: U2.A7@4030.63,3246.26 4031.81,3245.08 v1(4031.81,3240)
NetR13_1: R13.1 U3.20 | length 201.1
  Top Layer w4: R13.1@4045.5,2848.19 v1(4047.31,2850) ; v1(4074.31,2928) 4075.31,2929 4146.37,2929 U3.20
  Mid-Layer 1 w4: v1(4047.31,2850) 4047.31,2901 v1(4074.31,2928)
NetR25_1: R25.1 U7.3
  other v1: 4128.19,3755
NetR25_2: R25.2 U2.D8 | length 539.2
  Top Layer w4: v1(4055,3710) 4058.19,3710 4081.19,3733 4108.57,3733 4115.83,3725.74 R25.2
  Mid-Layer 2 w4: v1(4010,3305) 3995,3320 3995,3338.69 4001.31,3345 4030,3345 4045,3360 4045,3396.31 4054.34,3405.66 v1@4054.34,3710 ; v1@4054.34,3709.34 v1(4055,3710)
NetR27_2: R27.2 U7.16
  other v1: 4223.19,3885
NetR30_1: R30.1 U3.22 | length 41.1
  Top Layer w4: U3.22 4229.31,2861.81 R30.1
NetR31_1: R31.1 U3.21 | length 36.5
  Top Layer w4: U3.21 4184.24,2853.07 R31.1@4187.31,2850
NetR32_1: R32.1 U3.19 | length 35.4
  Top Layer w4: U3.19 4162.58,2871.54 4167.31,2866.81 R32.1
NetU2_C9: U2.C9 U5.9 | length 771.1
  Top Layer w4: v1(3980,3285) 3980.63,3285.63 U2.C9 ; v1(4025,3780) 4040,3795 4060,3795 4070,3785 4075,3785 4120,3785 4127.13,3792.13 U5.9
  Mid-Layer 2 w4: v1(3910,3400) 3910,3410 3920,3420 3935,3435 3935,3750 3970,3785 4020,3785 v1(4025,3780)
  Bottom Layer w4: v1(3910,3400) 3910,3330 3915,3325 3925,3315 3941.62,3315 3971.62,3285 v1(3980,3285)
NetU2_D7: U2.D7 U5.24 | length 846
  Top Layer w4: U5.24 4095.63,3950.63 v1(4110,3965)
  Mid-Layer 2 w4: v1(4030,3305) 4068.37,3343.37 4137.75,3343.37 4153.37,3343.37 4180,3370 4180,3870 ; v1(4110,3965) 4180,3895 4180,3865
NetU2_D9: U2.D9 U7.5 | length 539.4
  Mid-Layer 1 w4: v1(3990,3305) 3990,3325 4015,3350 4035,3350 4050,3365 4050,3390 4088.19,3428.19 4088.19,3701.81 4063.19,3726.81 v1(4063.19,3750)
  Bottom Layer w4: v1(4063.19,3750) 4077.79,3764.6 U7.5
NetU2_E7: U2.E7 U7.4 | length 472.1
  Mid-Layer 2 w4: v1(4030,3325) 4055,3350 4055,3395 4090,3430 4090,3706.81 v1(4103.19,3720)
  Bottom Layer w4: v1(4103.19,3720) 4108.5,3725.31 U7.4
NetU2_E8: U2.E8 U5.23 | length 980.7
  Top Layer w4: U5.23 4111.38,3941.38 v1@4147.5,3977.5
  Mid-Layer 1 w4: v1(4010,3325) 4027,3342 4038.31,3342 4127,3342 4145,3360 4145,3375 4170,3400 4170,3700 4180,3710 4215,3710 4235,3730 4235,3757.81 4274,3796.81 4274,3815 4274,3901 4200,3975 v1(4150,3975)
NetU2_G5: U2.G5 U7.6 | length 554.4
  Mid-Layer 2 w4: v1(4048.19,3775) 4080,3775 4161.74,3693.26 4161.74,3441.74 4085,3365 v1(4070,3365)
  Bottom Layer w4: v1@4046.5,3775 U7.6
NetU2_H9: U2.H9 U7.2 | length 547.4
  Mid-Layer 2 w4: v1@3990,3385 4000,3385 4010,3395 4010,3410 3990,3430 3990,3690 v1(4025,3725)
  Bottom Layer w4: v1(4025,3725) 4075,3725 4095,3705 4113.19,3705 4147.87,3739.68 U7.2
  other v1: 3995,3385
NetU2_J3: U2.J3 U5.12 | length 535.2
  Top Layer w4: v1(4105.44,3429.56) 4105.44,3409.18 U2.J3 ; U5.12 4225.83,3809.17 v1@4239.09,3795.91
  Mid-Layer 1 w4: v1(4105.44,3429.56) 4105.44,3690.44 4155,3740 4210,3795 v1(4238.19,3795)
NetU2_J4: U2.J4 U7.1 | length 474.1
  Mid-Layer 1 w4: v1(4090,3405) 4125,3405 4155,3435 4155,3700 4180,3725 v1(4208.19,3725)
  Bottom Layer w4: U7.1 4167.56,3745.63 4188.19,3725 v1(4208.19,3725)
NetU2_J7: U2.J7 U5.22 | length 752.1
  Top Layer w4: U2.J7 4032.15,3427.15 v1(4040,3435) ; U5.22 4127.13,3942.13 4140,3955 4155,3955 4160,3955 v1@4170,3965
  Mid-Layer 1 w4: v1(4040,3435) 4040,3685 4025,3700 4015,3710 4005,3720 4005,3735 4010,3740 4020,3750 4020,3760 4005,3775 4005,3850 4050,3895 4090,3935 4130,3935 4150,3935 v1@4172.5,3957.5
  other v1: 4170,3960
REF: *.11 C11.1 R12.1 U3.32 U3.43 | length 273
  Top Layer w4: C11.1 4210.5,3092.5 R12.1 4220.5,3034.57 U3.43
  Mid-Layer 1 w4: v1(4217.31,3035) 4224.31,3028 4224.31,2989.53 4232.67,2981.17 4232.67,2960.36 v1(4227.31,2955)
  Bottom Layer w6: *.11@4156.05,2920.63 4189.31,2920.63 4201.17,2932.49 4201.17,2938.87 4217.31,2955 v1(4227.31,2955)
RST_BAR: *.29 C4.1 R4.2 U2.A2 | length 243.3
  Top Layer w4: v1@4129.06,3205.94 U2.A2@4129.06,3246.26 ; v1(4130,3205) 4130,3193.19 R4.2
  Bottom Layer w4: C4.1@4133.19,3225 4130,3221.81 v1(4130,3205) 4130,3196.08 4089.31,3155.38 4089.31,3140.69 4093,3137 4116.54,3137 *.29
TCK: *.10 U2.B3 | length 564.6
  Bottom Layer w4: *.10 3957.05,2900.95 3903,2955 3903,3088 3963,3148 4049.31,3148 4095,3193.69 4095,3251.57 v1(4109.37,3265.94)
TDI/VPP: *.6 U2.C4 | length 635.8
  Mid-Layer 1 w4: v1(4055,3205) 4090,3240 v1(4090,3285)
  Bottom Layer w4: *.6@3998.26,2859.12 *.6 3928.43,2861.57 3887,2903 3887,3103.31 3947.69,3164 4004,3164 4025,3185 4035,3185 v1(4055,3205)
TDO/TDI: *.8 U2.C5 | length 597.8
  Bottom Layer w4: *.8 3958.74,2881.26 3895,2945 3895,3100 3951,3156 4046,3156 4070,3180 v1(4070,3285)
TEST/VPP: *.4 U2.A4 | length 696.2
  Top Layer w4: v1(4025,3200) 4025,3195 4040,3180 4070,3180 4089.69,3199.69 U2.A4@4089.69,3246.26
  Bottom Layer w4: *.4 3969.11,2841.89 3952.22,2825 3925,2825 3879,2871 3879,3106.63 3944.37,3172 3997,3172 v1(4025,3200)
TMS: *.27 U2.A3 | length 242.8
  Top Layer w4: U2.A3@4109.37,3246.26 4110,3245.63 v1(4110,3225)
  Bottom Layer w4: v1(4110,3225) 4110,3195 4074,3159 4074,3138 4094.31,3117.69 4094.31,3114.62 4097.6,3111.32 4097.6,3097.4 4112,3083 4155.74,3083 *.27
V1+: *.13 U3.33 | length 227.3
  Top Layer w6: v1(4077.31,2980) 4091.62,2965.69 4191.6,2965.69 4193.6,2963.69 4197.92,2968.01 U3.33
  Bottom Layer w4: v1(4077.31,2980) 4085.31,2972 4094.9,2972 4117.82,2949.08 4118.13,2949.08 4126.89,2940.32 *.13@4156.05,2940.32
V2+: *.9 U3.31 | length 339.9
  Top Layer w4: v1(4097.31,2950) 4194.27,2950 U3.31
  Bottom Layer w4: v1(4097.31,2950) 4097.31,2930 4057.31,2890 4057.31,2875 4082.31,2850 4092.31,2850 4107.31,2865 4107.31,2884.41 4120.46,2897.56 4120.46,2900.46 4120.94,2900.95 *.9@4156.05,2900.95
V3+: *.15 U3.34 | length 70.2
  Bottom Layer w6: *.15@4156.05,2960 4203.89,2960 v1(4219.67,2975.78)
V4+: *.7 U3.30 | length 96.6
  Bottom Layer w4: *.7@4156.05,2881.26 4188.57,2881.26 4219.67,2912.36 v1(4219.67,2932.48)
V5+: *.17 U3.35 | length 47
  Top Layer w6: v1(4156.05,2979.69) 4192.63,2979.69 U3.35
V6+: *.5 U3.29 | length 138.3
  Top Layer w4: U3.29 4199.98,2915.06 4230.05,2885 v1(4232.31,2885)
  Bottom Layer w4: *.5@4156.05,2861.57 4208.88,2861.57 v1(4232.31,2885)
V7+: *.19 U3.36 | length 111.7
  Top Layer w4: U3.36 4239.87,2997.44 v1(4242.31,2995)
  Bottom Layer w4: *.19@4156.05,2999.37 4237.94,2999.37 v1(4242.31,2995)
V8+: *.3 U3.28 | length 160.4
  Top Layer w4: U3.28 4236.48,2910.82 v1(4242.31,2905)
  Bottom Layer w4: *.3@4156.05,2841.89 4214.2,2841.89 4245.31,2873 4245.31,2902 v1(4242.31,2905)
V9+: *.21 U3.37 | length 129.4
  Top Layer w6: U3.37 4199.98,3011.36 4223.67,3011.36 v1(4237.31,3025)
  Bottom Layer w6: *.21@4156.05,3019.06 4231.36,3019.06 v1(4237.31,3025)
V10+: *.1 U3.27 | length 362.5
  Top Layer w4: v1(4073.92,2955) 4091.92,2937 4160.03,2937 U3.27
  Bottom Layer w4: v1(4073.92,2955) 4061.31,2942.38 4061.31,2905.31 4049.31,2893.31 4049.31,2871.69 4098.79,2822.2 *.1@4156.05,2822.2
VBAT: *.22 *.23 C1.2 P3.2 R2.1 R28.2 U1.1 U1.3 | length 2177.5
  Mid-Layer 2 w10: v1(3875,3265) 3865,3275 3865,3385 3890,3410 3890,3740 3900,3750 v1(3905,3750) ; v1(3955,3260) 3895,3200 v1(3895,3190) 3917,3168 3917,3038 3925,3030 3965,3030 3975,3020 v1(3997.31,3020) 4027.31,2990 4027.31,2835 4015,2822.69 4015,2785 4035,2765 v1(4062.31,2765) 4177.31,2880 4177.31,3075 4212.31,3110 4252.31,3110 4265.31,3097 4265.31,3073 4253.92,3061.62 v1@4242.31,3061.62
  Bottom Layer w4: 4198.74,3038.74 4220,3060 v1(4242.31,3060)
  Bottom Layer w6: *.23@4156.05,3038.74 4198.74,3038.74
  Bottom Layer w10: U1.3@3870,3260 3870,3215 v1(3895,3190) ; v1(3905,3750) 3905,3830 3933.62,3858.62 P3.2 ; R2.1 4047.31,2750 v1(4062.31,2765)
VCC_TOOL: *.2
VSSANA: *.25 C1.1 C2.1 C3.1 C4.2 C5.1 C6.1 C7.2 C8.2 C9.2 C10.2 C11.2 C12.2 C13.2 C14.2 C15.2 C16.2 C17.2 C18.2 C19.2 C20.2 C21.2 C22.2 C23.2 C24.2 C34.1 C35.1 C37.1 C38.1 C39.1 C40.2 C41.1 C42.1 C43.1 C44.1 C45.1 D1.2 P3.1 R3.2 R5.2 R10.2 R11.2 R12.2 R13.2 R18.2 R19.2 R20.2 R21.2 R22.2 R23.2 R24.2 R27.1 R28.1 R30.2 R31.2 R32.2 U1.2 U2.A5 U2.B8 U2.B9 U2.F9 U2.G2 U2.J1 U3.12 U3.14 U3.17 U3.66 U3.77 U4.2 U5.11 U5.18 U5.20 U5.25 U6.2 U6.4 U7.8 U7.14 U7.17 U7.20 U7.21 | length 4513.5
  Top Layer w4: C6.1@3895,3223.19 C5.1@3931.51,3223.19 ; C2.1 3905.88,3339.68 D1.2@3933.25,3367.06 ; C22.2 3905.31,2917 3930.9,2891.41 v1(3930.9,2880.12) ; C23.2 3954.68,3149.44 C17.2 3984.12,3146.81 ; C1.1 3931.51,3186.82 C5.1 3947.15,3220.32 U2.B9 U2.B8@4010.94,3265.94 ; D1.2 D1.2@3933.25,3367.06 ; 3947.31,3031.81 3947.31,3065.93 3976.37,3065.93 3977.31,3065 ; C44.1 3951.38,3813.07 U6.2 4001.5,3863.19 U6.4 4001.5,3878.31 4030,3906.81 v3(4030,3950) ; v1(3960,3225) 3970,3215 4040.26,3215 U2.A5 ; R20.2@3977.31,3021.81 3977.31,3065 ; U2.F9@3991.26,3344.68 3955.63,3344.68 D1.2@3933.25,3367.06 ; R24.2 3991.24,3146.81 3984.12,3146.81 ; R13.2 4020.5,2884.33 U3.77 4048.09,2885 v1(4072.31,2885) ; U3.66 4045.26,2987.04 v1(4052.31,2980) ; v1(4035,3750) 4055,3730 4065,3730 4083.19,3748.19 C24.2 ; R28.1@4113.83,2770 4119.12,2775.29 R22.2 ; v1(4127.31,2770) 4135.5,2778.19 C10.2 4164.37,2783.19 R11.2@4192.31,2783.19 ; v2(4135,3870) U5.25@4158.62,3893.62 ; U3.17 4140.93,2841.38 4157.31,2825 v1(4222.31,2825) ; C9.2@4142.31,3116.81 4175.94,3116.81 4183.18,3124.05 R23.2@4183.18,3150 ; U5.11 4158.62,3779.25 4168.19,3769.68 4170.32,3771.81 C38.1 C39.1 4258.19,3790.61 4258.19,3821.81 C43.1 4274,3844 4274,3870 4259,3885 R27.1 4230.63,3909.37 U5.18 4174.37,3909.37 U5.25@4158.62,3893.62 ; U5.20 U5.25@4158.62,3893.62 ; R11.2 R11.2@4192.31,2783.19 ; R31.2 4214.12,2833.19 v1(4222.31,2825) ; C11.2 4245,3105.25 v1(4245,3090) 4252.31,3090 4262.31,3080 R21.2 ; C21.2 4262.31,2863.19 R30.2 4224.12,2825 v1(4222.31,2825) ; 3977.31,3065 3977.31,3140 3984.12,3146.81 ; R11.2@4192.31,2783.19 4222.31,2813.19 v1(4222.31,2825)
  Mid-Layer 1 w10: v1(3885,3330) 3885,3756.81 v1(3955,3826.81) 3955.91,3826.81 4030,3900.91 v3(4030,3950)
  Mid-Layer 2 w4: v1(4245,3090) 4232.31,3090 4197.31,3055 4197.31,3021.62 4248.92,2970 v1(4252.31,2970)
  Bottom Layer w4: U1.2 3915,3245 3935,3225 v1(3960,3225) 3993.19,3225 R5.2 4003.19,3245 C8.2 ; R3.2 3931.81,2795 4000,2795 4015,2780 4070,2780 4080,2770 v1(4127.31,2770) ; v1(3942.31,3050) 3947.31,3045 C19.2 ; C42.1 v1(3990.01,3998.19) ; v1@3988.19,3996.37 v1(3990.01,3998.19) ; C41.1 v1(3990.01,3998.19) ; v3@4030,3945 4030,3944.48 v3(4030,3950) ; U7.8 U7.21 ; v1(4072.31,2885) 4090.26,2902.95 v1(4107.46,2902.95) ; C7.2@4083.33,3384.06 4109.37,3384.06 v1(4129.06,3364.37) 4137.88,3364.37 4142.57,3359.68 4117.87,3359.68 C35.1 ; U7.21@4147.87,3869.91 U7.14 ; v1(4148.74,3403.74) 4148.74,3431.93 C3.1@4151.81,3435 ; *.25@4156.05,3058.43 4207.11,3058.43 4216.69,3068 4229.61,3068 C12.2@4245.37,3083.75 ; C4.2@4156.81,3225 4245,3136.81 v1@4245,3096.61 ; U7.20 4167.56,3806.92 U7.21 ; U7.17 4154.16,3865.97 4148.19,3860 4141.9,3860 U7.21 ; v1(4222.31,2825) 4262.31,2865 C15.2 ; C13.2 4234.12,3107.5 v1@4245,3096.61 ; v1(4245,3090) v1@4245,3096.61
  Bottom Layer w10: v1(3955,3826.81) 3970.43,3811.38 P3.1 ; v3@4030,3945 U7.21
  other v1: 4157.31,3120 3988.19,3930 4058.19,4070
pads on no net: *.12 *.18 *.20 P3. U1.4 U2.A6 U2.A8 U2.A9 U2.B4 U2.B5 U2.B6 U2.B7 U2.C1 U2.C6 U2.D1 U2.D2 U2.D4 U2.D5 U2.D6 U2.E2 U2.E3 U2.E4 U2.E5 U2.E6 U2.F1 U2.F3 U2.F4 U2.F5 U2.F6 U2.F7 U2.F8 U2.G1 U2.G3 U2.G4 U2.G6 U2.G8 U2.H3 U2.H4 U2.H5 U2.H6 U2.H8 U2.J5 U2.J6 U4.4 U5.1 U5.2 U5.3 U5.4 U5.5 U5.6 U5.7 U5.14 U5.15 U5.16 U5.17 U5.19 U5.21

## Polygon pours and split planes (outlines as drawn)
+1.2V on VDD (split plane): 4174.9,3220 4175.29,3216.08 4176.43,3212.31 4178.29,3208.83 4180.79,3205.79 4264.9,3121.68 4264.9,2853.32 4161.68,2750.1 3883.32,2750.1 3860.1,2773.32 3860.1,3490 4174.9,3490
+1.9V on VDD (split plane): 4048.19,4090 4173.09,4090 4173.09,4001.81 4173.48,3997.89 4174.62,3994.12 4176.48,3990.65 4178.98,3987.6 4264.9,3901.68 4264.9,3763.32 4216.68,3715.1 4195,3715.1 4191.08,3714.71 4187.31,3713.57 4183.83,3711.71 4180.79,3709.21 4178.29,3706.17 4176.43,3702.69 4175.29,3698.92 4174.9,3695 4174.9,3655 3860.1,3655 3860.1,3725 3859.71,3728.92 3858.57,3732.69 3856.71,3736.17 3854.21,3739.21 3851.17,3741.71 3847.69,3743.57 3843.92,3744.71 3840,3745.1 3830.1,3745.1 3830.1,3924.9 3915,3924.9 3918.92,3925.29 3922.69,3926.43 3926.17,3928.29 3929.21,3930.79 3931.71,3933.83 3933.57,3937.31 3934.71,3941.08 3935.1,3945 3935.1,3993.49 3982.4,4040.79 4048.19,4106.58
VSSANA on VSS (split plane): 4174.9,3220 4175.29,3216.08 4176.43,3212.31 4178.29,3208.83 4180.79,3205.79 4264.9,3121.68 4264.9,2853.32 4161.68,2750.1 3883.32,2750.1 3860.1,2773.32 3860.1,3490 4174.9,3490
VSSANA on VSS (split plane): 4048.19,4090 4173.09,4090 4173.09,4001.81 4173.48,3997.89 4174.62,3994.12 4176.48,3990.65 4178.98,3987.6 4264.9,3901.68 4264.9,3763.32 4216.68,3715.1 4195,3715.1 4191.08,3714.71 4187.31,3713.57 4183.83,3711.71 4180.79,3709.21 4178.29,3706.17 4176.43,3702.69 4175.29,3698.92 4174.9,3695 4174.9,3655 3860.1,3655 3860.1,3725 3859.71,3728.92 3858.57,3732.69 3856.71,3736.17 3854.21,3739.21 3851.17,3741.71 3847.69,3743.57 3843.92,3744.71 3840,3745.1 3830.1,3745.1 3830.1,3924.9 3915,3924.9 3918.92,3925.29 3922.69,3926.43 3926.17,3928.29 3929.21,3930.79 3931.71,3933.83 3933.57,3937.31 3934.71,3941.08 3935.1,3945 3935.1,3993.49 3982.4,4040.79 4048.19,4106.58

## Keep-outs
Keep-Out Layer:
  lines w10: 3810,3725 3810,3945 3915,3945 3915,4001.81 3968.19,4055 4058.19,4145 4058.19,4355 4193.19,4355 4193.19,4001.81 4285,3910 4285,3755 4225,3695 4195,3695 4195,3665 4195,3530 4195,3220 4285,3130 4285,2845 4170,2730 3875,2730 3845,2760 3840,2765 3840,3725 3810,3725

## Other copper
VDD (plane layer: these items are gaps in the copper):
  rectangle: 4048.19,4090 4193.19,4355
VSS (plane layer: these items are gaps in the copper):
  rectangle: 4048.19,4090 4193.19,4355

## Silkscreen, mask and mechanical layers (free items; w line width, h text height)
Top Overlay:
  circle w7.87: c4040.51,3909.37 r3.94
  lines w10: 3990,2900 4025,2865 4220,2865 4245,2890 4245,3030 4225,3050 4145,3050 4125,3070 4030,3070 3990,3030 3990,2900
Top Paste:
  region: 4138.15,3866.85 4162.17,3866.85 4162.17,3845.98 4138.15,3845.98
  region: 4107.78,3866.85 4131.85,3866.85 4131.85,3845.94 4107.78,3845.94
  region: 4138.16,3894.02 4162.17,3894.02 4162.17,3873.16 4138.16,3873.16
  region: 4107.83,3894.02 4131.85,3894.02 4131.85,3873.15 4107.83,3873.15
Mechanical 1:
  lines w10: 3835,3490 3835,3655 4200,3655 4200,3490 3835,3490
Mechanical 4:
  circle w7.87: c4087.76,3913.31 r3.94
  circle w7.87: c4087.76,3913.31 r3.94
  lines w5: 4073.98,3808.98 4073.98,3931.02 ; 4073.98,3808.98 4196.02,3808.98 ; 4073.98,3808.98 4073.98,3931.02 ; 4073.98,3808.98 4196.02,3808.98 ; 4073.98,3931.02 4196.02,3931.02 ; 4073.98,3931.02 4196.02,3931.02 ; 4196.02,3808.98 4196.02,3931.02 ; 4196.02,3808.98 4196.02,3931.02